# Altium PCB Edge_Card_Ucc28951.PcbDoc
Units mm, origin at the board's own origin, x right, y up, seen from the top; angles counter-clockwise.
Board outline 120 x 68.9 mm, 2 copper layers (TopLayer, BottomLayer); 1 components, 215 nets, 100 pads, 0 vias.
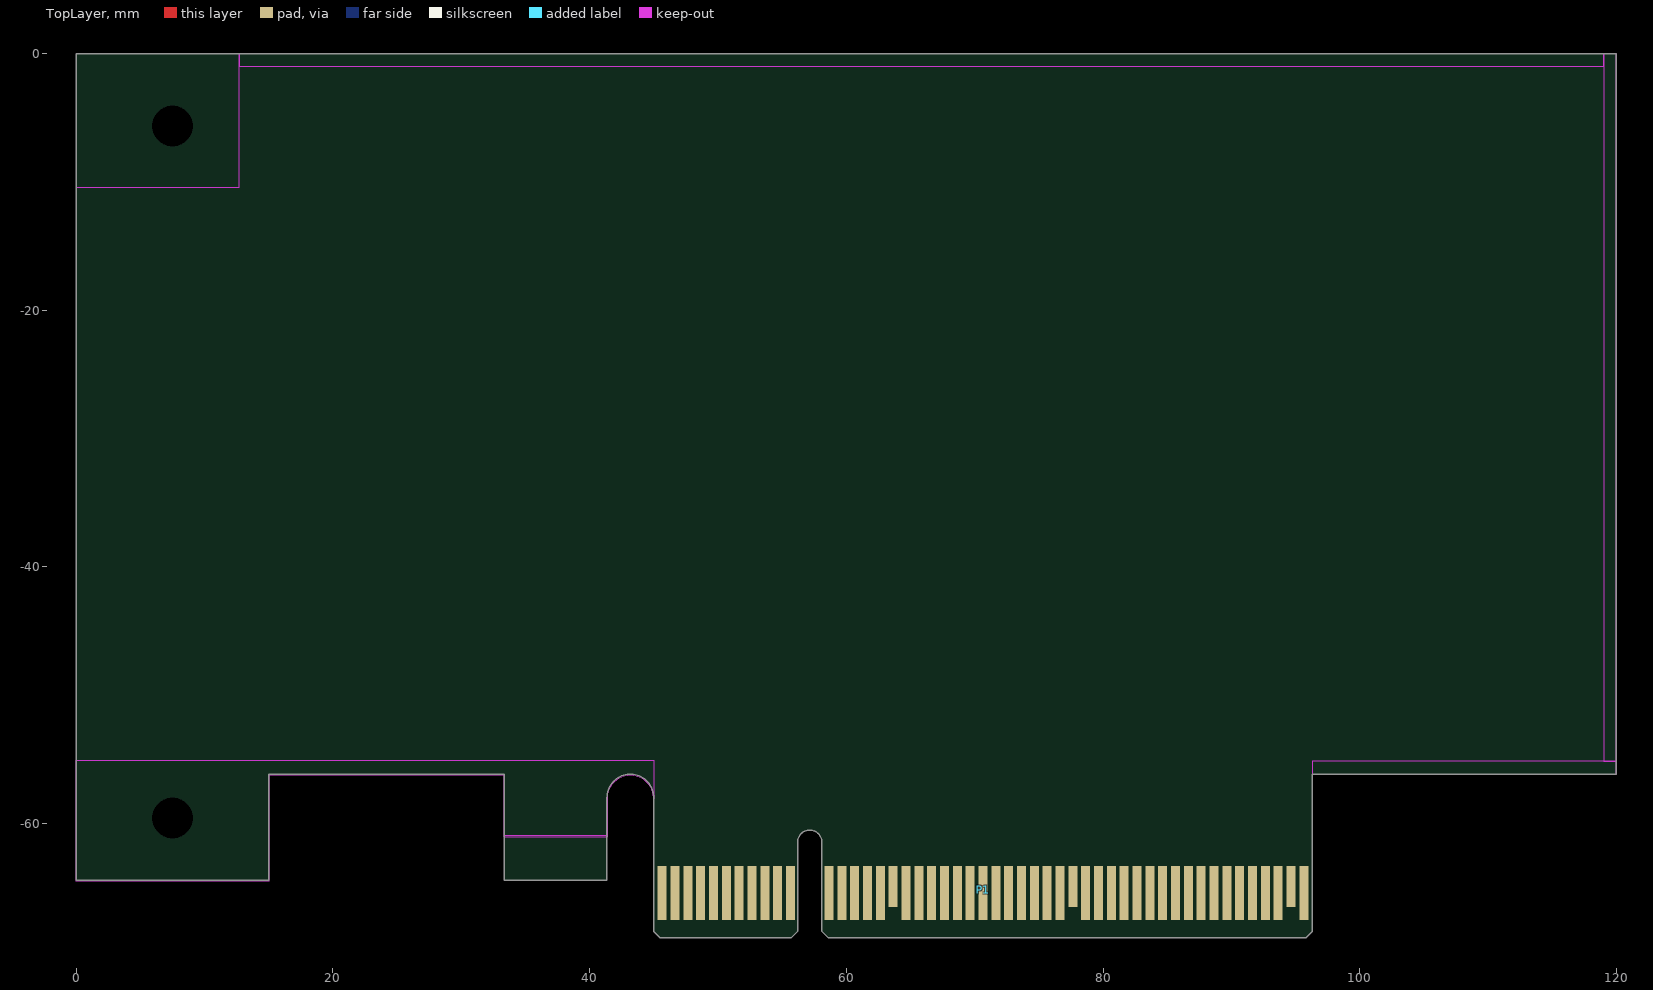
[diagram p0: TopLayer view]
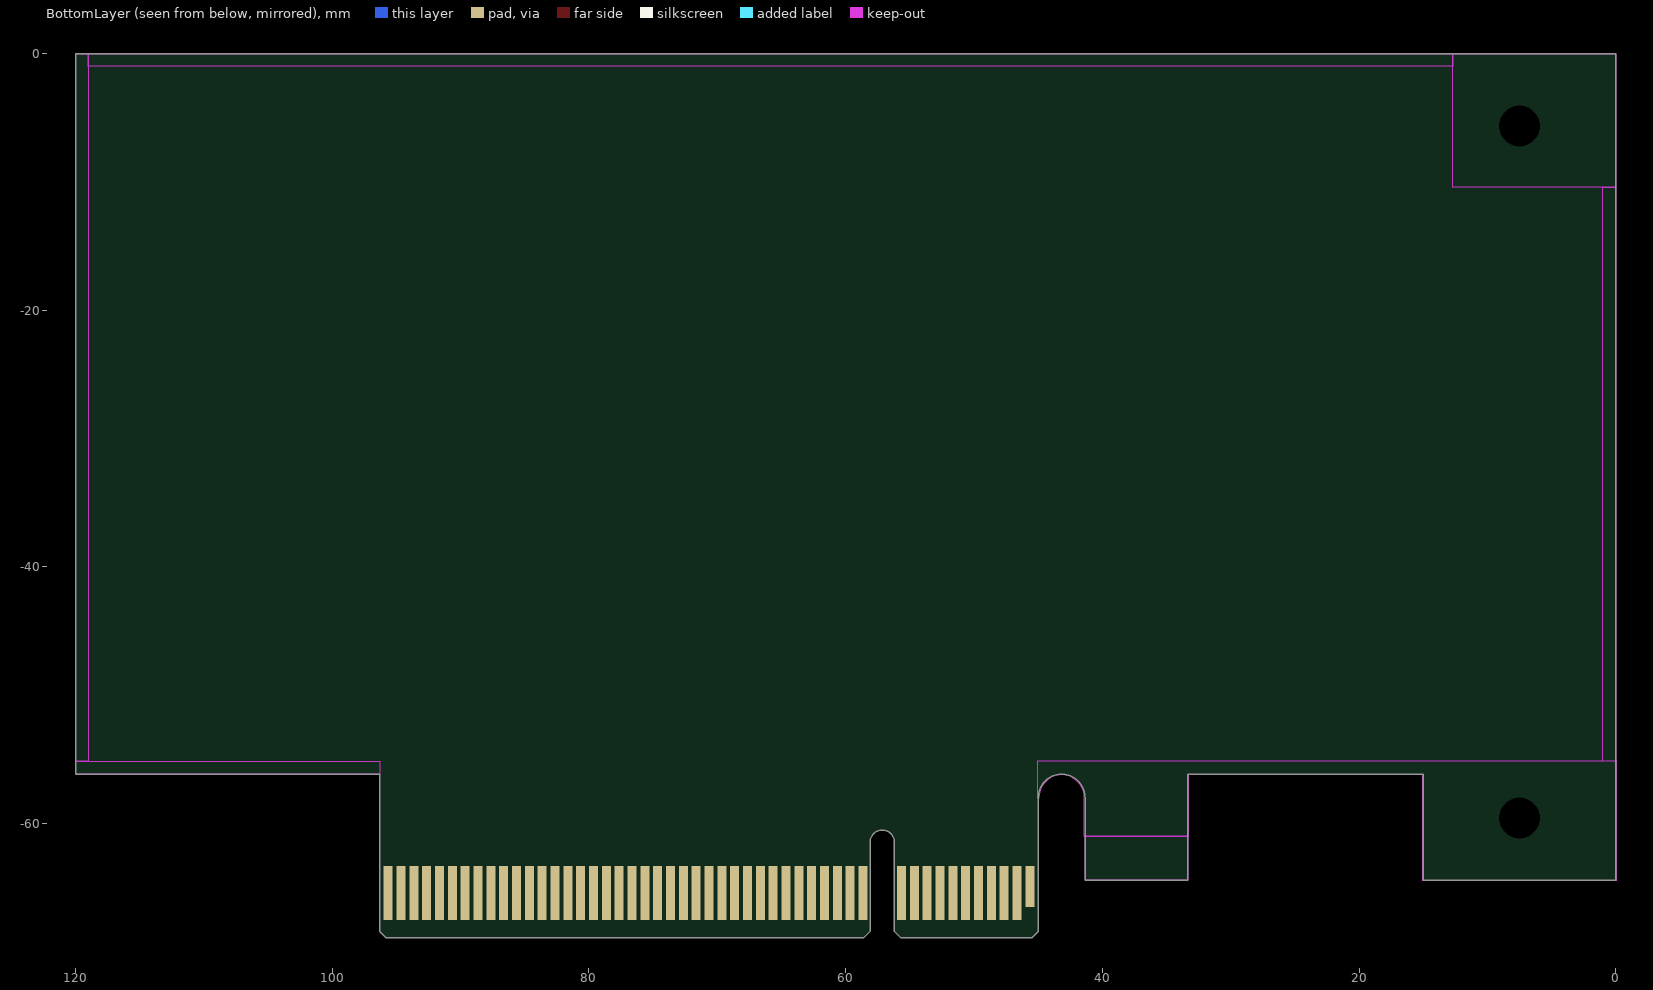
[diagram p1: BottomLayer view, seen from below]

## Layer stack, top to bottom
TopSolder: solder mask 0.025, SM-004, Dk 4
TopLayer: signal copper 0.0178
Dielectric1: core 0.32, FR-4, Dk 4.8
BottomLayer: signal copper 0.0178
BottomSolder: solder mask 0.025, SM-004, Dk 4

## Board outline
0,-64.4 15,-64.4 15,-56.15 33.35,-56.15 33.35,-64.4 41.35,-64.4 41.35,-57.975 cw(c43.175,-57.975) 45,-57.975 45,-68.4 45.5,-68.9 55.7,-68.9 56.2,-68.4 56.2,-61.45 cw(c57.15,-61.45) 58.1,-61.45 58.1,-68.4 58.6,-68.9 95.8,-68.9 96.3,-68.4 96.3,-56.15 120,-56.15 120,0 0,0

## Design rules (kind name [scope] priority, off if disabled: settings)
Clearance [All] p1: gap=0.18 ignorepadtopadclearanceinfootprint=FALSE
DiffPairsRouting [All] p1: maxlimit=0.254 minlimit=0.254 mostfreqgap=0.254 toplayer_minwidth=0.381 toplayer_maxwidth=0.381 toplayer_prefwidth=0.381 bottomlayer_minwidth=0.381 bottomlayer_maxwidth=0.381 bottomlayer_prefwidth=0.381 maxuncoupledlength=12.7
FabricationTestPointUsage TestPointUsage [All] p1: valid=0 allowmultiple=FALSE
FabricationTestpoint Testpoint [All] p1: side=3 testpointundercomponent=TRUE minsize=1.016 maxsize=2.54 preferedsize=1.524 minholesize=0.508 maxholesize=1.016 preferedholesize=0.813 testpointgrid=0.025 allowsidetop=TRUE allowsidebottom=TRUE usegrid=TRUE gridtolerance=0
Height "PCI Express, Page 84, \"Component Height Constraints\" for solder side" [OnBottomLayer] p1: minheight=0 maxheight=2.67 prefheight=2.67
Height "PCI Express, Page 84, \"Component Height Constraints\" for component side" [OnTopLayer] p2: minheight=0 maxheight=14.47 prefheight=14.47
MatchedLengths "Schematic Matched Net Lengths_5" [InNet('NetFL1_6')] p1: tolerance=0.2 checknetsindiffpair=TRUE checkdiffpairvsdiffpair=FALSE checkxsignals=FALSE checkothers=FALSE
MatchedLengths "Schematic Matched Net Lengths_4" [InNet('NetC15_3')] p2: tolerance=0.2 checknetsindiffpair=TRUE checkdiffpairvsdiffpair=FALSE checkxsignals=FALSE checkothers=FALSE
MatchedLengths "Schematic Matched Net Lengths_3" [InNet('NetC15_2')] p3: tolerance=0.2 checknetsindiffpair=TRUE checkdiffpairvsdiffpair=FALSE checkxsignals=FALSE checkothers=FALSE
MatchedLengths "Schematic Matched Net Lengths_2" [InNet('USB_N')] p4: tolerance=0.2 checknetsindiffpair=TRUE checkdiffpairvsdiffpair=FALSE checkxsignals=FALSE checkothers=FALSE
MatchedLengths "Schematic Matched Net Lengths_1" [InNet('NetFL1_5')] p5: tolerance=0.2 checknetsindiffpair=TRUE checkdiffpairvsdiffpair=FALSE checkxsignals=FALSE checkothers=FALSE
MatchedLengths "Schematic Matched Net Lengths" [InNet('USB_P')] p6: tolerance=0.2 checknetsindiffpair=TRUE checkdiffpairvsdiffpair=FALSE checkxsignals=FALSE checkothers=FALSE
MaxMinImpedance "Schematic Impedance Constraint_5" [InNet('NetC15_3')] p1: minimum=85.00 maximum=95.00
MaxMinImpedance "Schematic Impedance Constraint_4" [InNet('USB_P')] p2: minimum=85.00 maximum=95.00
MaxMinImpedance "Schematic Impedance Constraint_3" [InNet('NetC15_2')] p3: minimum=85.00 maximum=95.00
MaxMinImpedance "Schematic Impedance Constraint_2" [InNet('NetFL1_5')] p4: minimum=85.00 maximum=95.00
MaxMinImpedance "Schematic Impedance Constraint_1" [InNet('USB_N')] p5: minimum=85.00 maximum=95.00
MaxMinImpedance "Schematic Impedance Constraint" [InNet('NetFL1_6')] p6: minimum=85.00 maximum=95.00
PlaneClearance [All] p1: clearance=0
PolygonConnect [All] p1: connectstyle=Relief reliefconductorwidth=0.254 reliefentries=4 polygonreliefangle="90 Angle" airgapwidth=0.254
RoutingVias [All] p1: holewidth=0.711 width=1.27 viastyle="Through Hole" minholewidth=0.711 minwidth=1.27 maxholewidth=0.711 maxwidth=1.27
SilkToSolderMaskClearance SilkscreenOverComponentPads [IsPad] p1: minsilkscreentomaskgap=0.254 clearancetoexposedcopper=TRUE
SolderMaskExpansion [All] p1: expansion=0 istentingtop=FALSE
Width [All] p1: maxlimit=0.254 minlimit=0.254 preferedwidth=0.254
24 further rules are at their usual default settings.

## Classes and differential pairs
channel class MCU_Power: MCU_Power U_MCU_Power
net class LCD_D[0..7]: LCD_D0 LCD_D1 LCD_D2 LCD_D3 LCD_D4 LCD_D5 LCD_D6 LCD_D7
differential pair USB: +USB_P -USB_N

## Components (designator, comment, footprint, x,y, rotation, side; value= is the part's Value field where it differs from the comment)
P1 "PCIeX8-GF-2D-1000-1K-O98" PCIeX8-GF-2D-1000-1K-O98 55.15,-65.4 r0 top locked

## Footprints (in the part's own frame and the unit in brackets; to place one, negate y for a bottom-side part, rotate by r counter-clockwise, add the part's x,y. Pads: shape width x height; smd on the part's side, far side on the other; paste and mask are expansions set on the pad)
PCIeX8-GF-2D-1000-1K-O98 [mm] "Golden finger, PCIeX8, Dual, Opposite, Pitch 1mm, 98-Position"
  rect 0.7x3.2 smd far side: A1(-9.5,0.5)
  rect 0.7x4.2 smd far side: A2(-8.5,0) A3(-7.5,0) A4(-6.5,0) A5(-5.5,0) A6(-4.5,0) A7(-3.5,0) A8(-2.5,0) A9(-1.5,0) A10(-0.5,0) A11(0.5,0) A12(3.5,0) A13(4.5,0) A14(5.5,0) A15(6.5,0) A16(7.5,0) A17(8.5,0) A18(9.5,0) A19(10.5,0) A20(11.5,0) A21(12.5,0) A22(13.5,0) A23(14.5,0) A24(15.5,0) A25(16.5,0) A26(17.5,0) A27(18.5,0) A28(19.5,0) A29(20.5,0) A30(21.5,0) A31(22.5,0) A32(23.5,0) A33(24.5,0) A34(25.5,0) A35(26.5,0) A36(27.5,0) A37(28.5,0) A38(29.5,0) A39(30.5,0) A40(31.5,0) A41(32.5,0) A42(33.5,0) A43(34.5,0) A44(35.5,0) A45(36.5,0) A46(37.5,0) A47(38.5,0) A48(39.5,0) A49(40.5,0)
  rect 0.7x4.2 smd: B1(-9.5,0) B2(-8.5,0) B3(-7.5,0) B4(-6.5,0) B5(-5.5,0) B6(-4.5,0) B7(-3.5,0) B8(-2.5,0) B9(-1.5,0) B10(-0.5,0) B11(0.5,0) B12(3.5,0) B13(4.5,0) B14(5.5,0) B15(6.5,0) B16(7.5,0) B18(9.5,0) B19(10.5,0) B20(11.5,0) B21(12.5,0) B22(13.5,0) B23(14.5,0) B24(15.5,0) B25(16.5,0) B26(17.5,0) B27(18.5,0) B28(19.5,0) B29(20.5,0) B30(21.5,0) B32(23.5,0) B33(24.5,0) B34(25.5,0) B35(26.5,0) B36(27.5,0) B37(28.5,0) B38(29.5,0) B39(30.5,0) B40(31.5,0) B41(32.5,0) B42(33.5,0) B43(34.5,0) B44(35.5,0) B45(36.5,0) B46(37.5,0) B47(38.5,0) B49(40.5,0)
  rect 0.7x3.2 smd: B17(8.5,0.5) B31(22.5,0.5) B48(39.5,0.5)

## Part data
P1: "Golden finger, PCIeX8, Dual, Opposite, Pitch 1mm, 98-Position", Package Reference=GF-2D-1000-1K-O98, Package Version="rev2.0, Apr-2007", ClassName="Edge Connector", Datasheet Version="rev2.0, Apr-2007", Mating Connector=Molex-87715-9205, Publisher=Altium

## Free pads (board coordinates)
  round 2.88 hole 3.18 unplated: MH1(7.5,-59.55) MH2(7.5,-5.65)

## Nets (pads, with @x,y where several pads share a name; then routed paths per layer and width w, separated by ;. In a path a pad name is that pad's centre, name@x,y a point inside that pad or via, vN(x,y) a via of type N, cw(c..) or ccw(c..) an arc to the next point about the centre after c; other vN are vias at no path point)
3.3V_D: 
5V_C: 
5V_D: 
15V_C: 
120V_LV_SENSE: 
A15_SYS_JTDI: 
AGND: 
AVDD: 
CAN_H: 
CAN_L: 
Chassis: 
Driver_Enable_SIG: 
E3.3V: 
E5V: 
EA+: 
EA–: 
EN_28951: 
FAN1_PWM: 
FAN2_PWM: 
FDCAN_RX_N: 
FDCAN_TX_P: 
GND: 
GND_C: 
GND_ISO_CAN: 
GNDC: 
I_Ref: 
I_ref_PWM: 
Iin_PSFB_Sense: 
Iout_PSFB_Sense: 
IR_IN: 
LCD_CS: 
LCD_D0: 
LCD_D1: 
LCD_D2: 
LCD_D3: 
LCD_D4: 
LCD_D5: 
LCD_D6: 
LCD_D7: 
LCD_RD: 
LCD_RS: 
LCD_RST: 
LCD_WR: 
LED_Green: 
LED_Yellow: 
Mains_Sense: 
NetC6_2: 
NetC12_1: 
NetC12_2: 
NetC14_1: 
NetC15_2: 
NetC15_3: 
NetC15_4: 
NetC16_1: 
NetC18_2: 
NetC24_1: 
NetC25_2: 
NetC27_1: 
NetC29_1: 
NetC33_1: 
NetC35_1: 
NetC61_MCU_Power_1: 
NetC61_U_MCU_Power_1: 
NetC64_MCU_Power_1: 
NetC64_MCU_Power_2: 
NetC64_U_MCU_Power_1: 
NetC64_U_MCU_Power_2: 
NetC70_1: 
NetC74_2: 
NetC77_1: 
NetC78_1: 
NetC79_1: 
NetC80_1: 
NetC81_1: 
NetC82_1: 
NetD4_1: 
NetD5_1: 
NetD15_2: 
NetD16_2: 
NetFL1_5: 
NetFL1_6: 
NetFL2_5: 
NetFL2_6: 
NetJP1_2: 
NetQ1_3: 
NetQ3_3: 
NetQ6_1: 
NetR3_2: 
NetR6_2: 
NetR7_1: 
NetR8_1: 
NetR22_2: 
NetR29_1: 
NetR33_2: 
NetR34_2: 
NetR35_1: 
NetR36_1: 
NetR37_1: 
NetR39_2: 
NetR43_1: 
NetR44_1: 
NetR48_1: 
NetS1_1: 
NetSB21_2: 
NetT2_1: 
NetT2_3: 
NewNet1: 
NewNet2: 
NewNet3: 
NewNet4: 
NewNet5: 
NewNet6: 
NewNet7: 
NewNet8: 
NewNet9: 
NewNet10: 
NewNet11: 
OC_SIG: 
OSC32_IN: 
OSC32_OUT: 
OSC_IN: 
OSC_OUT: 
OUTA: 
OUTB: 
OUTC: 
OUTD: 
OUTE: 
OUTF: 
OV_SIG: 
P_SN: 
PA0: 
PA3: 
PA6: 
PA7: 
PA10: 
PA11_N: 
PA12_P: 
PA13: 
PA14: 
PA15: 
PB0: 
PB1: 
PB2: 
PB3: 
PB3_SYS_JTDO_TRACESWO: 
PB4: 
PB4_SYS_NJTRST: 
PB5: 
PB6: 
PB7: 
PB8-BOOT0: 
PB9: 
PB10: 
PB11: 
PC4: 
PC5: 
PC6: 
PC7: 
PC10: 
PC11: 
PC12: 
PC13: 
PC14-OSC32_IN: 
PC14_Pin: 
PC15-OSC32_OUT: 
PC15_Pin: 
PD0: 
PD1: 
PD2: 
PD5: 
PD6: 
PD7: 
PD12: 
PD13: 
PD14: 
PD15: 
PE13: 
PE14: 
PE15: 
PF0: 
PF0-OSC_IN: 
PF1: 
PF1-OSC_OUT: 
PF2: 
PF9: 
PF10: 
Relay_SIG_PFC_SD: 
Relay_SIG_Thermistor_PFC_SD: 
SD_SIG: 
SMBus_T_RST: 
SMBus_T_SCL: 
SMBus_T_SDA: 
SMBus_T_SMBA: 
SWCLK: 
SWDIO: 
SYNC: 
SYS_JTDI: 
SYS_JTDO_T_SWO: 
SYS_NJTRST: 
T_NRST: 
U5V: 
USART1_RX: 
USART1_TX: 
USB_N: 
USB_P: 
UV_SIG: 
V_Ref: 
V_ref_PWM: 
VBAT: 
VCC_ISO_CAN: 
Vin_PSFB_Sense: 
Vout_PSFB_Sense: 
VREF: 
VREF_28951: 
VREFP: 
pads on no net: P1.A1 P1.A2 P1.A3 P1.A4 P1.A5 P1.A6 P1.A7 P1.A8 P1.A9 P1.A10 P1.A11 P1.A12 P1.A13 P1.A14 P1.A15 P1.A16 P1.A17 P1.A18 P1.A19 P1.A20 P1.A21 P1.A22 P1.A23 P1.A24 P1.A25 P1.A26 P1.A27 P1.A28 P1.A29 P1.A30 P1.A31 P1.A32 P1.A33 P1.A34 P1.A35 P1.A36 P1.A37 P1.A38 P1.A39 P1.A40 P1.A41 P1.A42 P1.A43 P1.A44 P1.A45 P1.A46 P1.A47 P1.A48 P1.A49 P1.B1 P1.B2 P1.B3 P1.B4 P1.B5 P1.B6 P1.B7 P1.B8 P1.B9 P1.B10 P1.B11 P1.B12 P1.B13 P1.B14 P1.B15 P1.B16 P1.B17 P1.B18 P1.B19 P1.B20 P1.B21 P1.B22 P1.B23 P1.B24 P1.B25 P1.B26 P1.B27 P1.B28 P1.B29 P1.B30 P1.B31 P1.B32 P1.B33 P1.B34 P1.B35 P1.B36 P1.B37 P1.B38 P1.B39 P1.B40 P1.B41 P1.B42 P1.B43 P1.B44 P1.B45 P1.B46 P1.B47 P1.B48 P1.B49

## Keep-outs
TopLayer:
  rectangle: 0,-10.4 12.7,0
  rectangle: 12.7,-1 119,0
  rectangle: 96.3,-56.15 120,-55.15
  rectangle: 119,-55.15 120,0
  region: 0,-64.45 15,-64.45 ccw(c15,-64.4) 15.05,-64.4 15.05,-56.2 33.3,-56.2 33.3,-60.95 ccw(c33.35,-60.95) 33.35,-61 41.35,-61 ccw(c41.35,-60.95) 41.4,-60.95 ccw(c41.35,-60.95) 41.4,-60.949 41.4,-57.975 cw(c43.175,-57.975) 44.95,-57.975 ccw(c45,-57.975) 45.05,-57.975 45.05,-55.15 ccw(c45,-55.15) 45,-55.1 0,-55.1 ccw(c0,-55.15) -0.05,-55.15 -0.05,-64.4 ccw(c0,-64.4)
BottomLayer:
  rectangle: 0,-10.4 12.7,0
  rectangle: 119,-55.15 120,0
  rectangle: 96.3,-56.15 120,-55.15
  rectangle: 12.7,-1 119,0
  rectangle: 0,-55.15 1,-10.4
  region: 0,-64.45 15,-64.45 ccw(c15,-64.4) 15.05,-64.4 15.05,-56.2 33.3,-56.2 33.3,-60.95 ccw(c33.35,-60.95) 33.35,-61 41.35,-61 ccw(c41.35,-60.95) 41.4,-60.95 ccw(c41.35,-60.95) 41.4,-60.949 41.4,-57.975 cw(c43.175,-57.975) 44.95,-57.975 ccw(c45,-57.975) 45.05,-57.975 45.05,-55.15 ccw(c45,-55.15) 45,-55.1 0,-55.1 ccw(c0,-55.15) -0.05,-55.15 -0.05,-64.4 ccw(c0,-64.4)
TopSolder:
  rectangle: 33.35,-64.4 41.35,-60.95
BottomSolder:
  rectangle: 33.35,-64.4 41.35,-60.95
KeepOutLayer:
  rectangle: 33.35,-64.4 41.35,-60.95

## Silkscreen, mask and mechanical layers (free items; w line width, h text height)
PCI-SIG Outline:
  lines w0.1: 0,-64.4 15,-64.4 15,-56.15 33.35,-56.15 33.35,-64.4 41.35,-64.4 41.35,-57.975 cw(c43.175,-57.975) 45,-57.975 45,-68.4 45.5,-68.9 55.7,-68.9 56.2,-68.4 56.2,-61.45 cw(c57.15,-61.45) 58.1,-61.45 58.1,-68.4 58.6,-68.9 95.8,-68.9 96.3,-68.4 96.3,-56.15 120,-56.15 120,-8.863 120,0 104.813,0 0,0 0,-64.4
PCI-SIG Notes:
  text "- Nominal values used, dimensions in mm" at 12.25,9.184 h1.52
  text "- The mounting holes and keep-out areas around them are only required when the I/O bracket is mounted on the card directly" at 12.25,7.406 h1.52
  text "- Component height rule and clearance rule derived from PCI_Express_CEM_r2.0.pdf, Page 84." at 12.25,5.628 h1.52
  text "- Stackup is not specified in PCI_Express_CEM_r2.0.pdf, nor implemented in this template." at 12.25,3.85 h1.52
Mechanical7:
  lines w0.1: 0,-64.4 0,-55.15 45,-55.15 45,-57.975 ccw(c43.175,-57.975) 41.35,-57.975 41.35,-60.95 33.35,-60.95 33.35,-56.15 15,-56.15 15,-64.4 0,-64.4